# Altium PCB STM32F413Nucleo_NT35510__PCB.PcbDoc
Units mm, origin at the board's own origin, x right, y up, seen from the top; angles counter-clockwise.
Board outline 77.88 x 88.1 mm, 2 copper layers (Top Layer, Bottom Layer), stack 1.671 mm thick; 24 components, 29 nets, 190 pads, 0 vias.
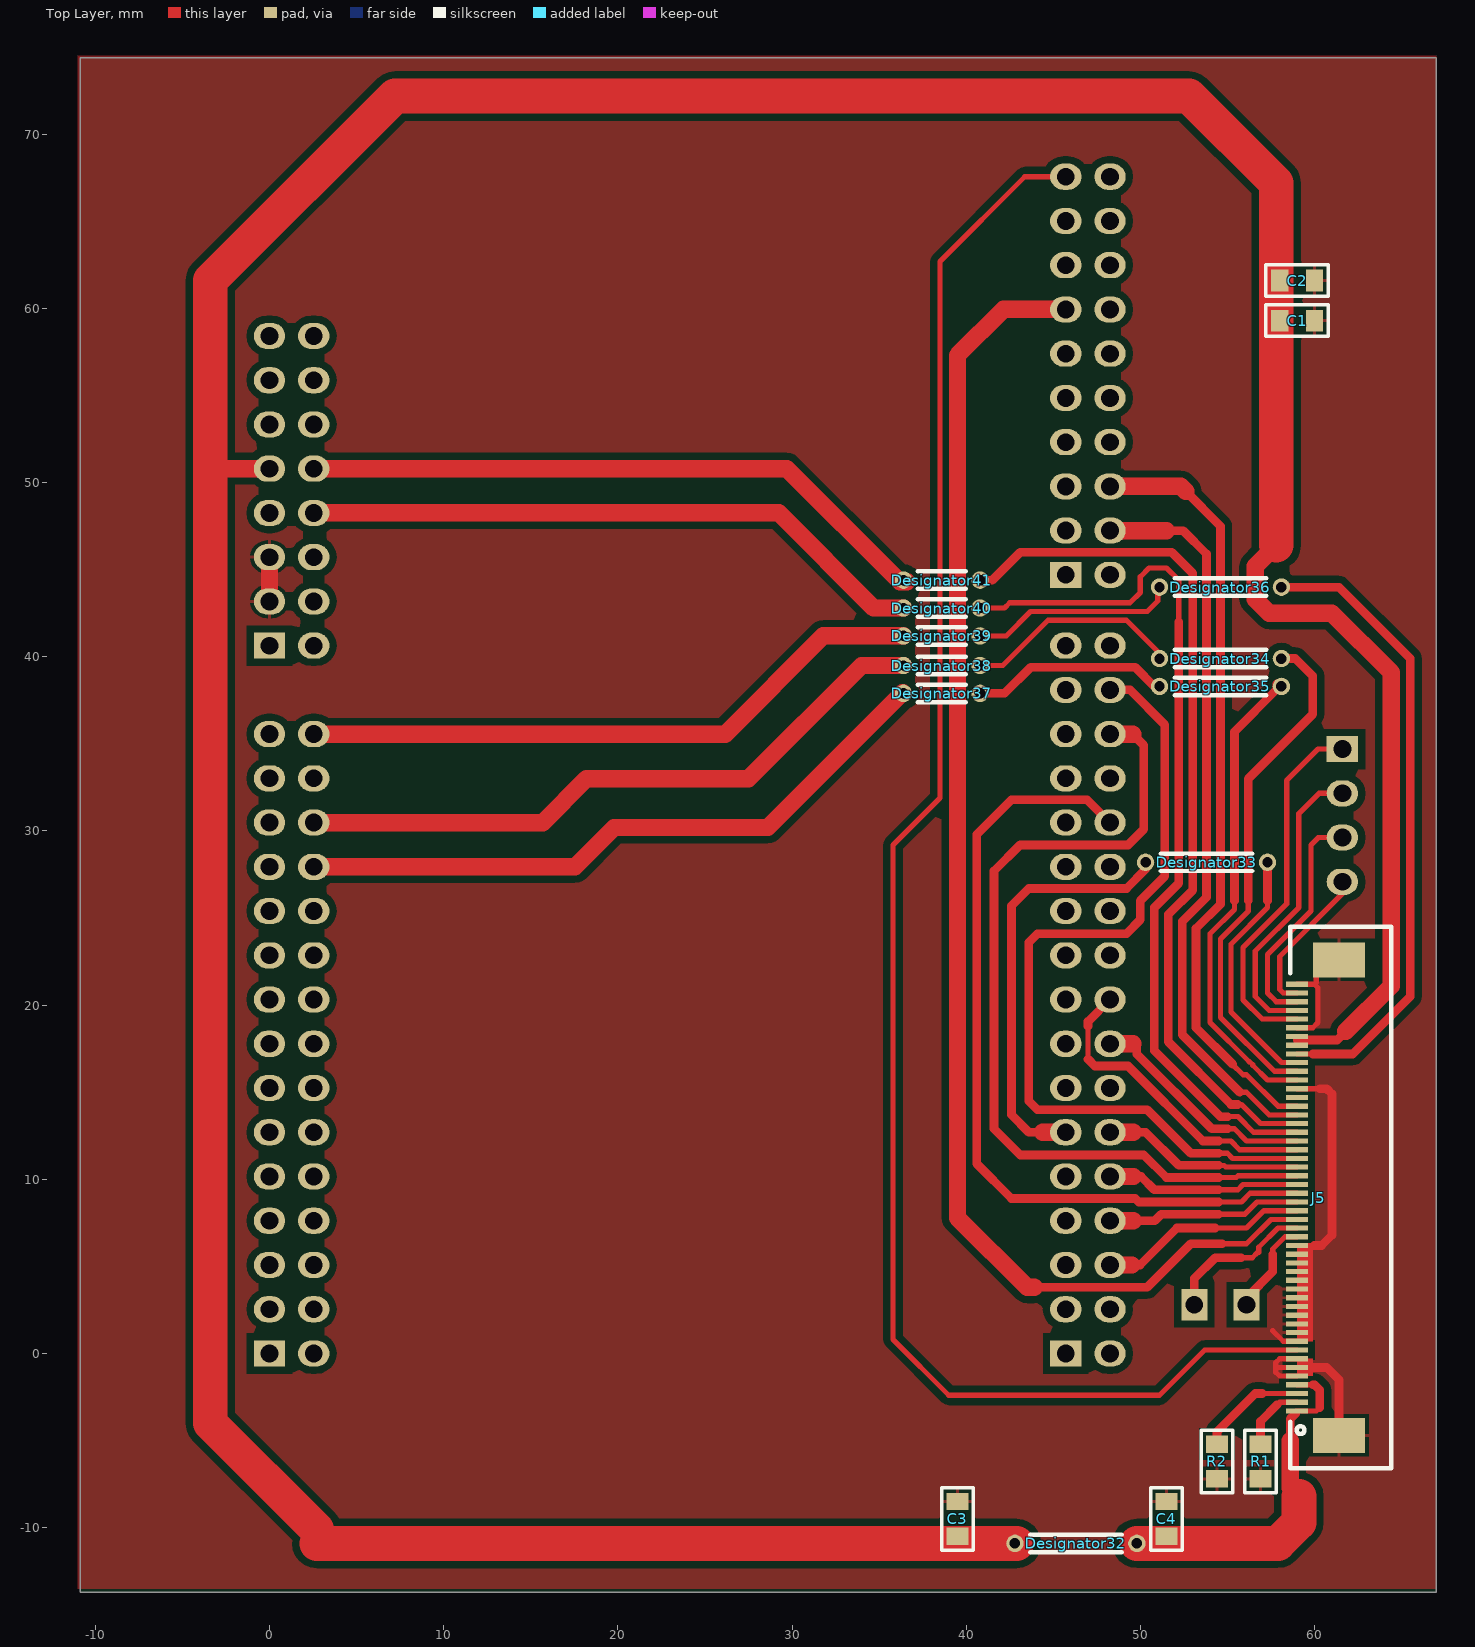
[diagram p0: Top Layer view]
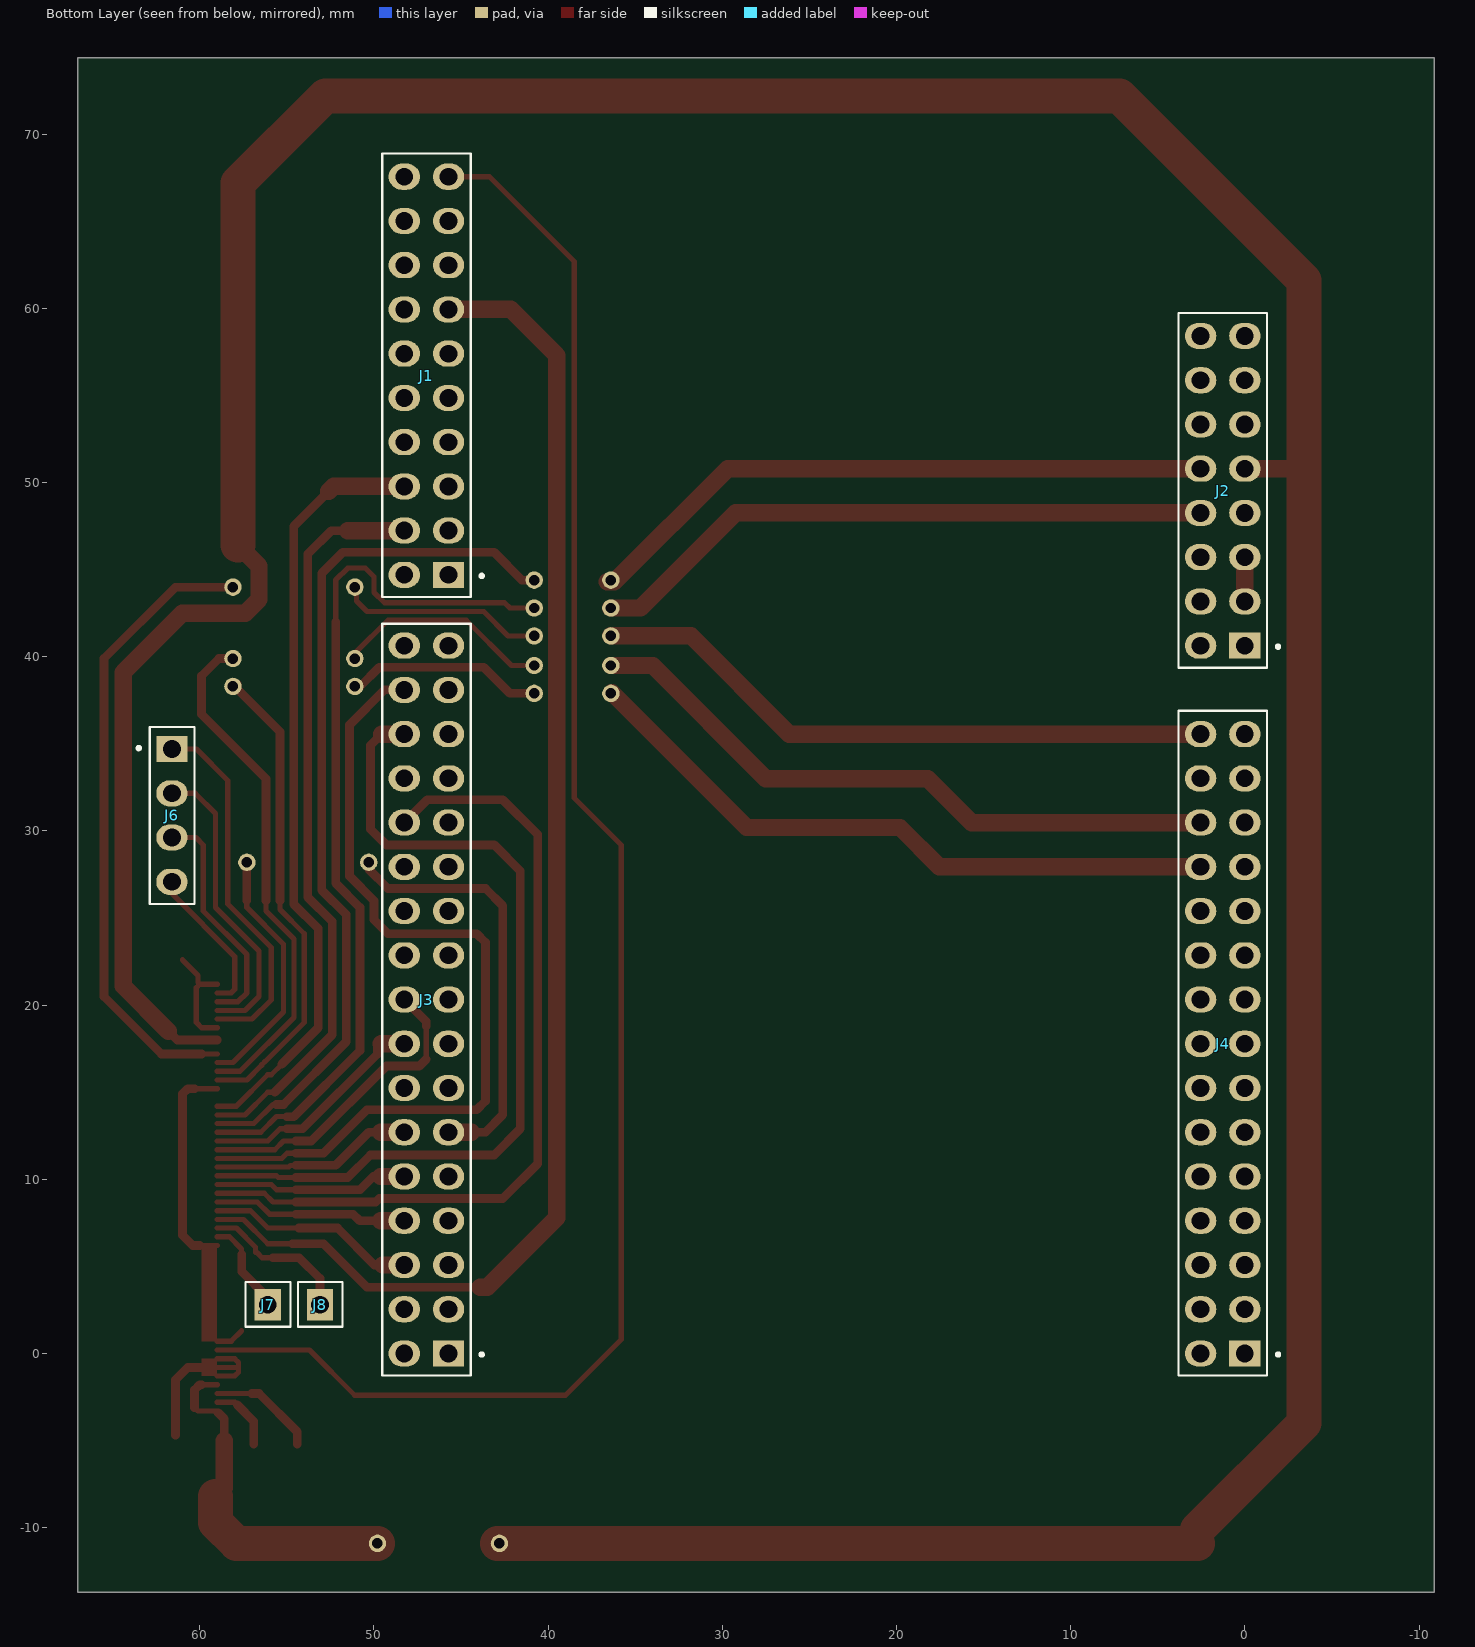
[diagram p1: Bottom Layer view, seen from below]

## Layer stack, top to bottom
Top Solder: solder mask 0.0102, Solder Resist, Dk 3.5
Top Layer: signal copper 0.0356
Dielectric 1: dielectric 1.6, FR-4, Dk 4.8
Bottom Layer: signal copper 0.0356
Bottom Solder: solder mask 0.0102, Solder Resist, Dk 3.5

## Board outline
-10.875,-13.7 -10.875,74.4 67,74.4 67,-13.7

## Design rules (kind name [scope] priority, off if disabled: settings)
Clearance [All] p1: gap=0.15 except(0.4: Track-Poly SMDPad-Poly THPad-Poly)
MinimumSolderMaskSliver [All] p1: minsoldermaskwidth=0.08
PolygonConnect [All] p1: connectstyle=Relief reliefconductorwidth=0.2 reliefentries=4 polygonreliefangle="90 Angle" airgapwidth=0.2
RoutingVias [All] p1: holewidth=0.3 width=0.6 viastyle="Through Hole" minholewidth=0.3 minwidth=0.6 maxholewidth=0.3 maxwidth=0.6
SilkToSolderMaskClearance [IsPad] p1: minsilkscreentomaskgap=0.15 clearancetoexposedcopper=TRUE
SolderMaskExpansion [All] p1: expansion=0.102
Width [All] p1: maxlimit=5 minlimit=0.2 preferedwidth=0.5
28 further rules are at their usual default settings.

## Components (designator, comment, footprint, x,y, rotation, side; value= is the part's Value field where it differs from the comment)
C1 "Capacitor 0.1uf" "Capacitor 0805" 59,59.3 r180 top
C2 "Capacitor 10u" "Capacitor 0805" 59,61.6 r180 top
C3 "Capacitor 10u" "Capacitor 0805" 39.5,-9.5 r270 top
C4 "Capacitor 0.1uf" "Capacitor 0805" 51.5,-9.5 r270 top
Designator32 "Comment" JUMPER_5MM 46.3,-10.9 r0 top
Designator33 "Comment" JUMPER_5MM 53.8,28.2 r0 top
Designator34 "Comment" JUMPER_5MM 54.6,39.9 r0 top
Designator35 "Comment" JUMPER_5MM 54.6,38.3 r0 top
Designator36 "Comment" JUMPER_5MM 54.6,44 r0 top
Designator37 "Comment" JUMPER_2MM2 38.6,37.9 r0 top
Designator38 "Comment" JUMPER_2MM2 38.6,39.5 r0 top
Designator39 "Comment" JUMPER_2MM2 38.6,41.2 r0 top
Designator40 "Comment" JUMPER_2MM2 38.6,42.8 r0 top
Designator41 "Comment" JUMPER_2MM2 38.6,44.4 r0 top
J1 "HEADER_2X10" HEADER_2X10 45.72,44.704 r90 bottom
J2 "HEADER_2X8" HEADER_2X8 0,40.64 r90 bottom
J3 "HEADER_2X17" HEADER_2X17 45.72,0 r90 bottom
J4 "HEADER_2X15" HEADER_2X15 0,0 r90 bottom
J5 "NT35510_Controller" ER-CON50HT-1 59,-3.3 r90 top
J6 "HEADER_1X4" HEADER_1X4 61.6,34.7 r270 bottom
J7 "HEADER 1X1" HEADER_1X1 56.1,2.8 r180 bottom
J8 "HEADER 1X1" HEADER_1X1 53.1,2.8 r180 bottom
R1 "Resistor 680R" RES_0805(2012) 56.9,-6.2 r270 top
R2 "Resistor 680R" RES_0805(2012) 54.4,-6.2 r270 top

## Footprints (in the part's own frame and the unit in brackets; to place one, negate y for a bottom-side part, rotate by r counter-clockwise, add the part's x,y. Pads: shape width x height; smd on the part's side, far side on the other; paste and mask are expansions set on the pad)
"Capacitor 0805" [mm]
  rect 1x1.25 smd: 1(-1,0) 2(1,0)
  silkscreen extent -1.8,-0.9 1.8,0.9, body extent -1,-0.62 1,0.62, height 1.46
ER-CON50HT-1 [mm] "SMD FPC Connector, Pitch 0.5mm, Top Contact 50 P"
  rect 0.3x1.25 smd: 1(0,0) 2(0.5,0) 3(1,0) 4(1.5,0) 5(2,0) 6(2.5,0) 7(3,0) 8(3.5,0) 9(4,0) 10(4.5,0) 11(5,0) 12(5.5,0) 13(6,0) 14(6.5,0) 15(7,0) 16(7.5,0) 17(8,0) 18(8.5,0) 19(9,0) 20(9.5,0) 21(10,0) 22(10.5,0) 23(11,0) 24(11.5,0) 25(12,0) 26(12.5,0) 27(13,0) 28(13.5,0) 29(14,0) 30(14.5,0) 31(15,0) 32(15.5,0) 33(16,0) 34(16.5,0) 35(17,0) 36(17.5,0) 37(18,0) 38(18.5,0) 39(19,0) 40(19.5,0) 41(20,0) 42(20.5,0) 43(21,0) 44(21.5,0) 45(22,0) 46(22.5,0) 47(23,0) 48(23.5,0) 49(24,0) 50(24.5,0)
  rect 2x3 smd: 51(-1.4,-2.4) 52(25.9,-2.4)
  silkscreen extent -3.3,-5.4 27.8,0.4, body extent -3.07,-5.25 27.58,0.25, height 2.05
HEADER_1X1 [mm] "Male Header, Pitch 2.54mm, 1x1 Position"
  rect 1.5x1.8 hole 1.02: 1(0,0)
  silkscreen extent -1.27,-1.27 1.3,1.3, body extent -1.27,-1.27 1.27,1.27, height 9
HEADER_1X4 [mm] "Male Header, Pitch 2.54mm, 1x4 P"
  rect 1.5x1.8 hole 1.02: 1(0,0)
  oval 1.5x1.8 hole 1.02: 2(2.54,0) 3(5.08,0) 4(7.62,0)
  silkscreen extent -1.27,-1.96 8.9,1.3, body extent -1.27,-1.27 8.89,1.27, height 9
HEADER_2X8 [mm] "Male Header, Pitch 2.54mm, 2x8 P"
  oval 1.5x1.8 hole 1.02: 1(17.78,0) 2(17.78,2.54) 3(15.24,0) 4(15.24,2.54) 5(12.7,0) 6(12.7,2.54) 7(10.16,0) 8(10.16,2.54) 9(7.62,0) 10(7.62,2.54) 11(5.08,0) 12(5.08,2.54) 13(2.54,0) 14(2.54,2.54) 16(0,2.54)
  rect 1.5x1.8 hole 1.02: 15(0,0)
  silkscreen extent -1.27,-1.96 19.1,3.81, body extent -1.27,-1.27 19.05,3.81, height 9
HEADER_2X10 [mm] "Male Header, Pitch 2.54mm, 2x10 Position"
  oval 1.5x1.8 hole 1.02: 1(22.86,0) 2(22.86,2.54) 3(20.32,0) 4(20.32,2.54) 5(17.78,0) 6(17.78,2.54) 7(15.24,0) 8(15.24,2.54) 9(12.7,0) 10(12.7,2.54) 11(10.16,0) 12(10.16,2.54) 13(7.62,0) 14(7.62,2.54) 15(5.08,0) 16(5.08,2.54) 17(2.54,0) 18(2.54,2.54) 20(0,2.54)
  rect 1.5x1.8 hole 1.02: 19(0,0)
  silkscreen extent -1.27,-1.96 24.2,3.81, body extent -1.27,-1.27 24.13,3.81, height 9
HEADER_2X15 [mm] "Male Header, Pitch 2.54mm, 2x15 P"
  oval 1.5x1.8 hole 1.02: 1(35.56,0) 2(35.56,2.54) 3(33.02,0) 4(33.02,2.54) 5(30.48,0) 6(30.48,2.54) 7(27.94,0) 8(27.94,2.54) 9(25.4,0) 10(25.4,2.54) 11(22.86,0) 12(22.86,2.54) 13(20.32,0) 14(20.32,2.54) 15(17.78,0) 16(17.78,2.54) 17(15.24,0) 18(15.24,2.54) 19(12.7,0) 20(12.7,2.54) 21(10.16,0) 22(10.16,2.54) 23(7.62,0) 24(7.62,2.54) 25(5.08,0) 26(5.08,2.54) 27(2.54,0) 28(2.54,2.54) 30(0,2.54)
  rect 1.5x1.8 hole 1.02: 29(0,0)
  silkscreen extent -1.27,-1.96 36.9,3.81, body extent -1.27,-1.27 36.83,3.81, height 9
HEADER_2X17 [mm] "Male Header, Pitch 2.54mm, 2x17 Position"
  oval 1.5x1.8 hole 1.02: 1(40.64,0) 2(40.64,2.54) 3(38.1,0) 4(38.1,2.54) 5(35.56,0) 6(35.56,2.54) 7(33.02,0) 8(33.02,2.54) 9(30.48,0) 10(30.48,2.54) 11(27.94,0) 12(27.94,2.54) 13(25.4,0) 14(25.4,2.54) 15(22.86,0) 16(22.86,2.54) 17(20.32,0) 18(20.32,2.54) 19(17.78,0) 20(17.78,2.54) 21(15.24,0) 22(15.24,2.54) 23(12.7,0) 24(12.7,2.54) 25(10.16,0) 26(10.16,2.54) 27(7.62,0) 28(7.62,2.54) 29(5.08,0) 30(5.08,2.54) 31(2.54,0) 32(2.54,2.54) 34(0,2.54)
  rect 1.5x1.8 hole 1.02: 33(0,0)
  silkscreen extent -1.27,-1.96 41.9,3.81, body extent -1.27,-1.27 41.91,3.81, height 9
JUMPER_2MM2 [mm]
  round 1 hole 0.6: 1(-2.2,0) 2(2.2,0)
  silkscreen extent -1.38,-0.5 1.38,0.5, body extent -2.5,-0.3 2.5,0.3, height 0.8
JUMPER_5MM [mm] "5mm"
  round 1 hole 0.6: 1(-3.5,0) 2(3.5,0)
  silkscreen extent -2.63,-0.5 2.63,0.5, body extent -3.8,-0.3 3.8,0.3, height 0.8
RES_0805(2012) [mm]
  rect 1x1.25 smd: 1(-1,0) 2(1,0)
  silkscreen extent -1.8,-0.9 1.8,0.9, body extent -1,-0.62 1,0.63, height 0.5

## Part data
J1: "Header, Dual row, 10-Pin"
J2: "Header, Dual row, 8-Pin"
J3: "Header, Dual row, 17-Pin"
J4: "Header, Dual row, 15-Pin"
J5: "NT35510 LCD Controller"
J6: "Header, Single row, 4-Pin"
J7 J8: "Header, Single row, 1-Pin"
R1 R2: "Resistor"

## Nets (pads, with @x,y where several pads share a name; then routed paths per layer and width w, separated by ;. In a path a pad name is that pad's centre, name@x,y a point inside that pad or via, vN(x,y) a via of type N, cw(c..) or ccw(c..) an arc to the next point about the centre after c; other vN are vias at no path point)
CS: Designator36.1 Designator36.2 Designator39.1 Designator39.2 J4.2 J5.42 | length 84.4
  Top Layer w0.3: Designator39.2 42.3,41.2 43.7,42.6 50.4,42.6 51,43.2 Designator36.1@51,43.9 ; J5.42 59.9,17.2
  Top Layer w0.5: Designator36.2@58,43.9 Designator36.2 61.4,44 65.5,39.9 65.5,20.5 62.2,17.2 59.9,17.2
  Top Layer w1: J4.2 26.16,35.56 31.8,41.2 Designator39.1
D0: J1.16 J5.36 | length 44.3
  Top Layer w0.3: 55.3,16.6 55.9,16 56.1,16 57.9,14.2 J5.36
  Top Layer w0.5: 52.6,49.5 54.6,47.5 54.6,25.8 53.2,24.4 53.2,18.7 55.3,16.6
  Top Layer w1: J1.16 52.316,49.784 52.6,49.5
D1: J1.18 J5.35 | length 42.8
  Top Layer w0.3: 55.7,15 56.1,15 57.4,13.7 J5.35
  Top Layer w0.5: 51.5,47.244 52.456,47.244 53.8,45.9 53.8,26.2 52.4,24.8 52.4,18.3 55.7,15
  Top Layer w1: J1.18 51.5,47.244
D2: Designator41.1 Designator41.2 J2.8 J5.34 | length 86.9
  Top Layer w0.3: 55.6,14.3 55.8,14.3 56.9,13.2 J5.34
  Top Layer w0.5: Designator41.2 41.5,44.4 43.1,46 51.8,46 53,44.8 53,26.6 51.6,25.2 51.6,17.9 55.2,14.3 55.6,14.3
  Top Layer w1: J2.8 29.7,50.8 36.2,44.3 Designator41.1@36.6,44.3
D3: Designator40.1 Designator40.2 J2.10 J5.33 | length 87
  Top Layer w0.3: Designator40.2 42.2,42.8 42.5,43.1 49.4,43.1 50,43.7 50,44.6 50.5,45.1 51.5,45.1 52.2,44.4 52.2,42 ; 55,13.6 55.6,13.6 56.5,12.7 J5.33
  Top Layer w0.5: 52.2,42 52.2,27 50.8,25.6 50.8,17.4 54.6,13.6 55,13.6
  Top Layer w1: J2.10 29.24,48.26 34.7,42.8 Designator40.1
D4: J3.20 J5.32 | length 13.3
  Top Layer w0.3: 55,12.9 55.4,12.9 56.1,12.2 J5.32
  Top Layer w0.5: 49.58,17.78 49.8,17.56 49.8,17.2 54.1,12.9 55,12.9
  Top Layer w1: J3.20 49.58,17.78
D5: J3.18 J5.31 | length 18.1
  Top Layer w0.3: 47,16.9 47,18.8 ; 54.5,12.2 55.2,12.2 55.7,11.7 J5.31
  Top Layer w0.5: 47,16.9 47.4,16.5 49.3,16.5 53.6,12.2 54.5,12.2 ; 47,18.8 47,19.06 J3.18
D6: J3.4 J5.30 | length 48.6
  Top Layer w0.3: 54.5,11.5 55,11.5 55.3,11.2 J5.30
  Top Layer w0.5: J3.4 49.4,38.1 51.4,36.1 51.4,27.4 50,26 50,24.9 49.2,24.1 44.1,24.1 43.6,23.6 43.6,14.5 44.1,14 50.4,14 52.9,11.5 54.5,11.5
D7: J3.24 J5.29 | length 11.6
  Top Layer w0.3: 54.5,10.8 54.8,10.8 54.9,10.7 J5.29
  Top Layer w0.5: 49.6,12.7 50.3,12.7 52.2,10.8 54.5,10.8
  Top Layer w1: J3.24 49.6,12.7
D8: J3.6 J5.28 | length 50
  Top Layer w0.3: 54.5,10.1 55.5,10.1 55.6,10.2 J5.28
  Top Layer w0.5: 49.56,35.56 50.2,34.92 50.2,30.1 49.3,29.2 43.1,29.2 41.6,27.7 41.6,12.9 43.1,11.4 50.2,11.4 51.5,10.1 54.5,10.1
  Top Layer w1: J3.6 49.56,35.56
D9: J3.26 J5.27 | length 11.2
  Top Layer w0.3: 54.5,9.4 55.6,9.4 55.9,9.7 J5.27
  Top Layer w0.5: 49.6,10.16 50.04,10.16 50.8,9.4 54.5,9.4
  Top Layer w1: J3.26 49.6,10.16
D10: J3.10 J5.26 | length 47.5
  Top Layer w0.3: 54.5,8.7 55.8,8.7 56.3,9.2 J5.26
  Top Layer w0.5: J3.10 46.94,31.8 42.6,31.8 40.6,29.8 40.6,10.9 42.6,8.9 49.7,8.9 49.9,8.7 54.5,8.7
D11: J3.28 J5.25 | length 11.2
  Top Layer w0.3: 54.5,8 56,8 56.7,8.7 J5.25
  Top Layer w0.5: 49.6,7.62 50.82,7.62 51.2,8 54.5,8
  Top Layer w1: J3.28 49.6,7.62
D12: J3.30 J5.24 | length 12
  Top Layer w0.3: 54.3,7.2 56.1,7.2 57.1,8.2 J5.24
  Top Layer w0.5: 49.5,5.08 49.98,5.08 52.1,7.2 54.3,7.2
  Top Layer w1: J3.30 49.5,5.08
D13: J1.7 J5.23 | length 79.6
  Top Layer w0.3: 54.7,6.3 56.1,6.3 57.5,7.7 J5.23
  Top Layer w0.5: 43.9,3.8 50.4,3.8 52.9,6.3 54.7,6.3
  Top Layer w1: 43.9,3.8 43.5,3.8 39.5,7.8 39.5,57.3 42.144,59.944 J1.7
D14: J5.22 J8.1 | length 8.8
  Top Layer w0.3: 55.8,5.5 56.422,5.5 56.722,5.8 56.8,5.8 56.8,6.1 57.9,7.2 J5.22
  Top Layer w0.5: J8.1 53.1,4.3 54.3,5.5 55.8,5.5
D15: J5.21 J7.1 | length 5.5
  Top Layer w0.3: 57.6,5.7 57.6,6 58.3,6.7 J5.21
  Top Layer w0.5: J7.1 56.1,3.206 57.6,4.706 57.6,5.7
GND: C1.1 C2.1 C3.1 C4.1 J2.11 J2.13 J5.5 J5.6 J5.7 J5.9 J5.10 J5.11 J5.12 J5.13 J5.14 J5.15 J5.16 J5.17 J5.18 J5.19 J5.20 J5.38 J5.45 J5.50 J5.51 J5.52 R1.2 R2.2 | length 32.7
  Top Layer w0.3: 57.6,1.3 58.2,0.7 J5.9 ; 57.775,-0.8 J5.6 ; J5.5 58,-1.3 57.775,-1.075 57.775,-0.525 58,-0.3 J5.7 ; J5.20 60,6.2 ; J5.38 60.3,15.2 ; J5.45 59.9,18.7 60.2,19 60.2,21 60,21.2 ; J5.50 60,21.2 ; J5.52@61,22.6 60.1,21.7 60.1,21.3 60,21.2
  Top Layer w0.5: 59.7,-0.8 60.7,-0.8 61.4,-1.5 J5.51 ; 60,6.2 60.4,6.2 61,6.8 61,14.9 60.7,15.2 60.3,15.2
  Top Layer w1: J2.13 J2.11
LEDK1: J5.2 R1.1 | length 3.9
  Top Layer w0.3: 57.85,-2.95 58,-2.8 J5.2
  Top Layer w0.5: R1.1 56.9,-3.9 57.85,-2.95
LEDK2: J5.3 R2.1 | length 6.2
  Top Layer w0.3: 57,-2.3 58.2,-2.3 58.275,-2.3 J5.3
  Top Layer w0.5: R2.1 54.4,-4.5 56.6,-2.3 57,-2.3
NOE: Designator35.1 Designator35.2 Designator37.1 Designator37.2 J4.8 J5.39 | length 76.7
  Top Layer w0.3: 55.4,26 55.4,25.5 54,24.1 54,19 56.25,16.75 56.274,16.75 56.45,16.574 56.45,16.55 57.3,15.7 J5.39
  Top Layer w0.5: Designator37.2 42.2,37.9 43.7,39.4 49.7,39.4 50.8,38.3 Designator35.1@51,38.3 ; 55.4,26 55.4,35.7 57.85,38.15 Designator35.2@57.85,38.45
  Top Layer w1: J4.8 17.54,27.94 19.8,30.2 28.6,30.2 Designator37.1@36.35,37.95
NWE: Designator34.1 Designator34.2 Designator38.1 Designator38.2 J4.6 J5.40 | length 79.8
  Top Layer w0.3: Designator38.2 42.1,39.5 44.7,42.1 49.2,42.1 51,40.3 Designator34.1@51,39.9 ; 56.2,26 56.2,25.4 54.6,23.8 54.6,19.3 57.7,16.2 J5.40
  Top Layer w0.5: 56.2,26 56.2,33 59.9,36.7 59.9,38.9 58.9,39.9 Designator34.2@58,39.9
  Top Layer w1: J4.6 15.68,30.48 18.2,33 27.5,33 34,39.5 Designator38.1
RS: Designator33.1 Designator33.2 J3.23 J5.41 | length 39
  Top Layer w0.3: 57.3,26 57.3,25.6 55.2,23.5 55.2,19.6 58.1,16.7 J5.41
  Top Layer w0.5: 44.4,12.7 43.6,12.7 42.6,13.7 42.6,25.7 43.6,26.7 49.2,26.7 50.3,27.8 Designator33.1 ; 57.3,26 Designator33.2
  Top Layer w1: 44.4,12.7 J3.23
RST: J1.1 J5.8 | length 97.9
  Top Layer w0.3: J1.1 43.364,67.564 38.5,62.7 38.5,31.9 35.8,29.2 35.8,0.8 39,-2.4 51.1,-2.4 53.7,0.2 J5.8
VCC: C1.2 C2.2 C3.2 C4.2 Designator32.1 Designator32.2 J2.7 J5.1 J5.4 J5.43 J5.44 | length 264.4
  Top Layer w0.3: J5.1 60.1,-3.3 60.3,-3.1 ; J5.4 59.9,-1.8
  Top Layer w0.5: 58.6,-5 58.6,-3.75 J5.1@58.95,-3.4 ; 59,18 61.3,18 61.8,18.5 ; 59.9,-1.8 60,-1.8 60.3,-2.1 60.3,-3.1
  Top Layer w1: -3.4,50.8 J2.7 ; 57.8,46.4 56.6,45.2 56.6,43.3 57.4,42.5 61,42.5 64.4,39.1 64.4,21.1 61.8,18.5 ; 58.6,-5 58.6,-7.7 59.1,-8.2
  Top Layer w2: 2.712,-10.912 Designator32.1@42.9,-10.912 ; 2.712,-10.112 -3.4,-4 -3.4,61.6 7.2,72.2 52.8,72.2 57.8,67.2 57.8,46.4 ; Designator32.2 57.9,-10.9 59.1,-9.7 59.1,-8.2
XL: J5.48 J6.3 | length 13.4
  Top Layer w0.3: J5.48 57.8,20.2 57.3,20.7 57.3,22.9 59.8,25.4 59.8,29.2 60.22,29.62 J6.3
XR: J5.46 J6.1 | length 21.1
  Top Layer w0.3: J5.46 57,19.2 55.9,20.3 55.9,23.3 58.4,25.8 58.4,32.9 60.2,34.7 J6.1
YD: J5.47 J6.2 | length 17.2
  Top Layer w0.3: J5.47 57.4,19.7 56.6,20.5 56.6,23.1 59.1,25.6 59.1,31 60.26,32.16 J6.2
YU: J5.49 J6.4 | length 8.8
  Top Layer w0.3: J5.49 58.2,20.7 58,20.9 58,22.8 61.6,26.4 J6.4
pads on no net: J1.2 J1.3 J1.4 J1.5 J1.6 J1.8 J1.9 J1.10 J1.11 J1.12 J1.13 J1.14 J1.15 J1.17 J1.19 J1.20 J2.1 J2.2 J2.3 J2.4 J2.5 J2.6 J2.9 J2.12 J2.14 J2.15 J2.16 J3.1 J3.2 J3.3 J3.5 J3.7 J3.8 J3.9 J3.11 J3.12 J3.13 J3.14 J3.15 J3.16 J3.17 J3.19 J3.21 J3.22 J3.25 J3.27 J3.29 J3.31 J3.32 J3.33 J3.34 J4.1 J4.3 J4.4 J4.5 J4.7 J4.9 J4.10 J4.11 J4.12 J4.13 J4.14 J4.15 J4.16 J4.17 J4.18 J4.19 J4.20 J4.21 J4.22 J4.23 J4.24 J4.25 J4.26 J4.27 J4.28 J4.29 J4.30 J5.37

## Polygon pours and split planes (outlines as drawn)
GND on Top Layer "Top Layer-No Net" (solid, remove dead copper, pour order 2): -11,-13.5 -11,74.5 67,74.5 67,-13.5 -11,-13.5

## Other copper
Top Layer:
  rectangle net GND: 59,0.7 59.9,6.2
  rectangle net GND: 59,-1.3 59.9,-0.3